# Altium PCB Driver_1.PcbDoc
Units mil, origin at the board's own origin, x right, y up, seen from the top; angles counter-clockwise.
Board outline 3937.01 x 3937.01 mil, 2 copper layers (Top Layer, Bottom Layer); 114 components, 78 nets, 357 pads, 413 vias.
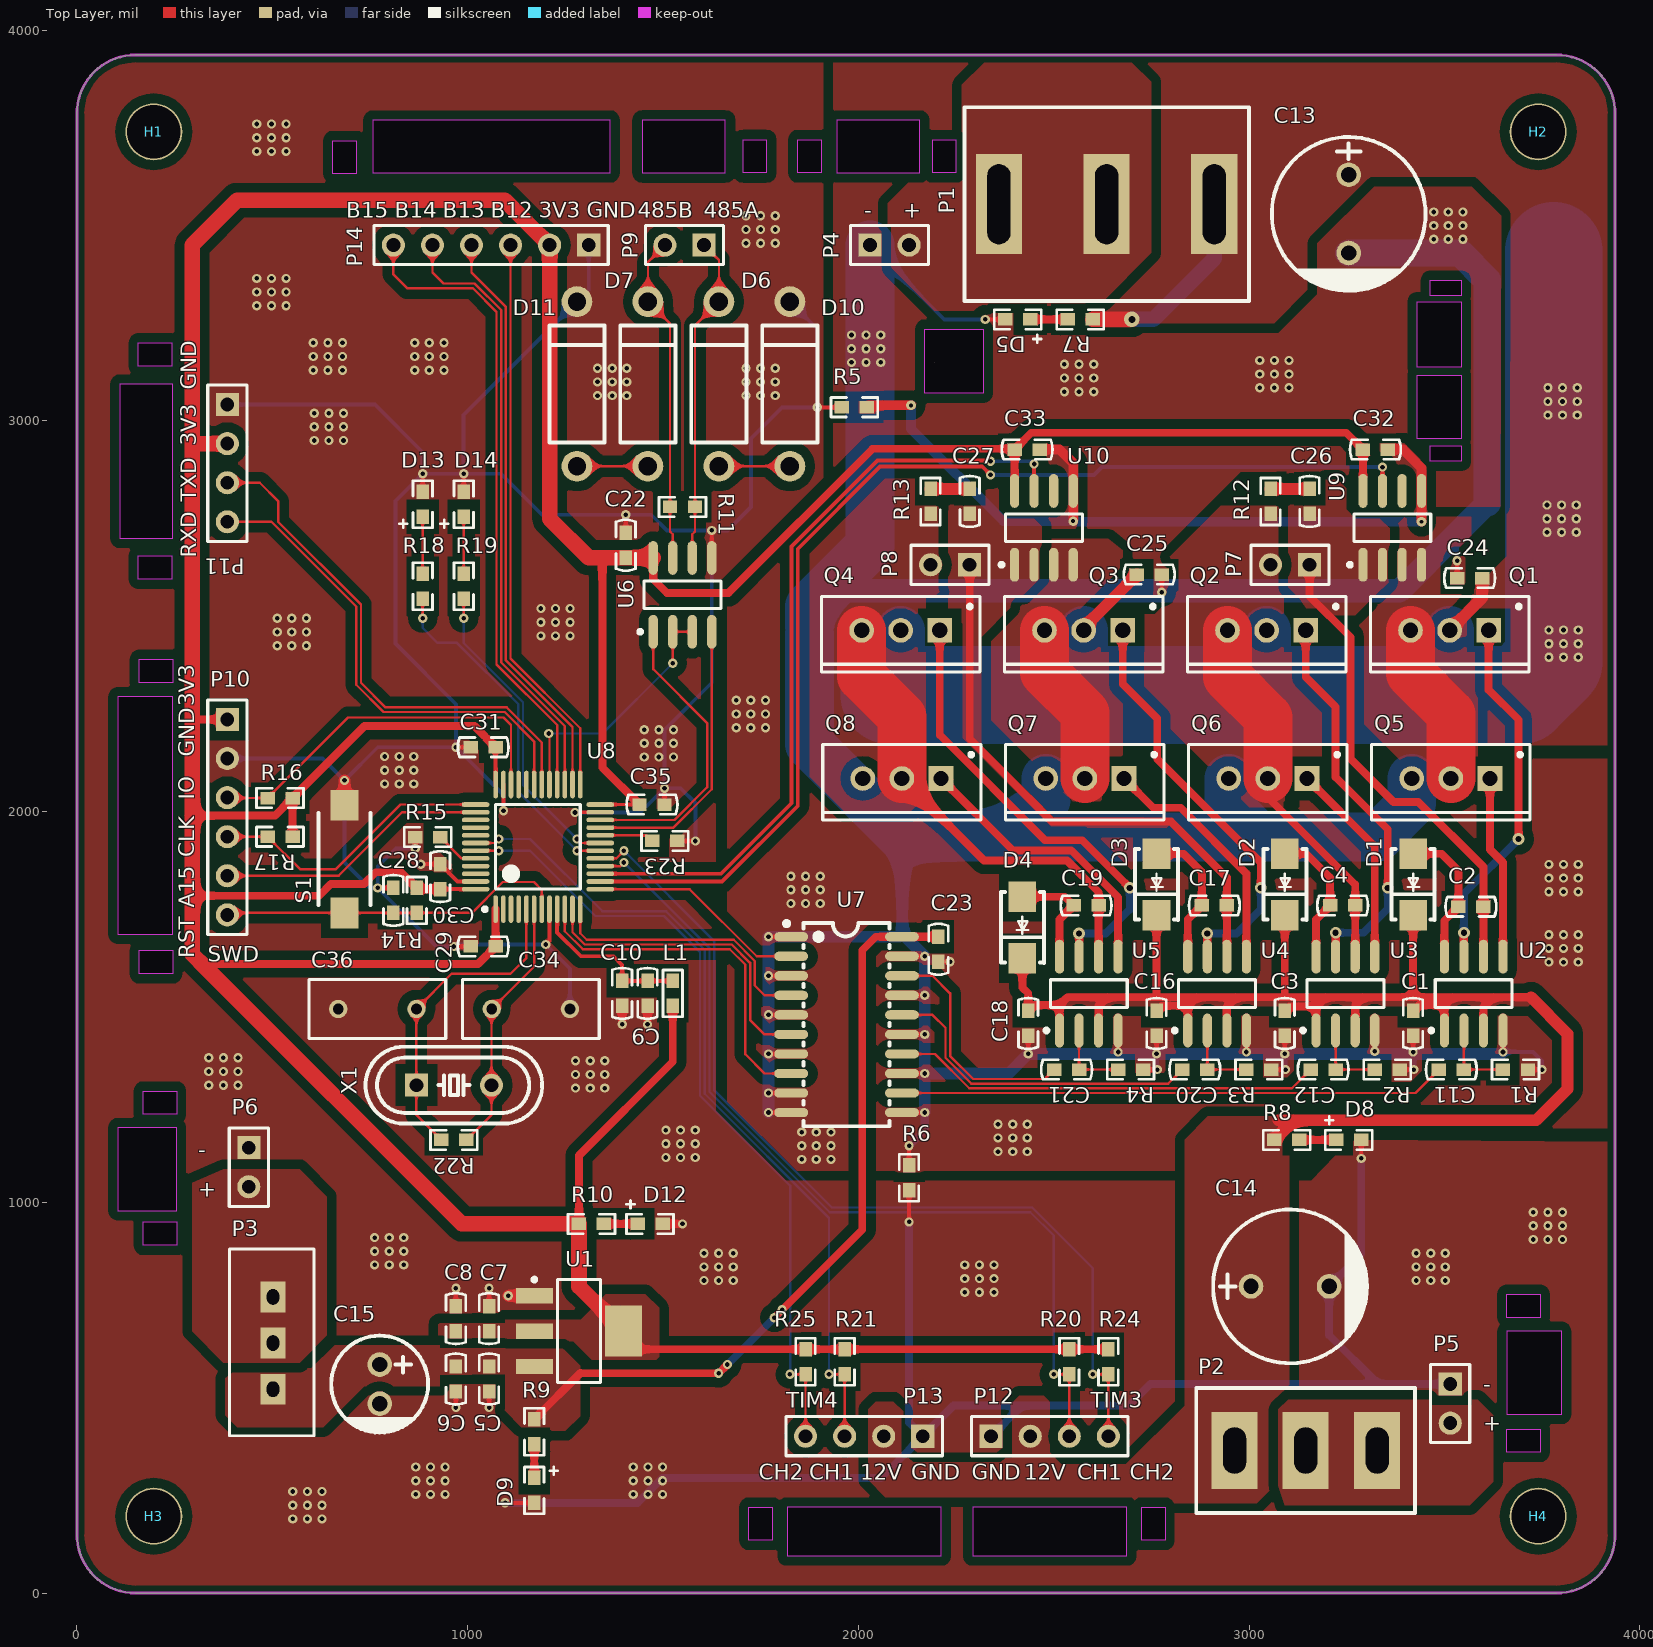
[diagram p0: Top Layer view]
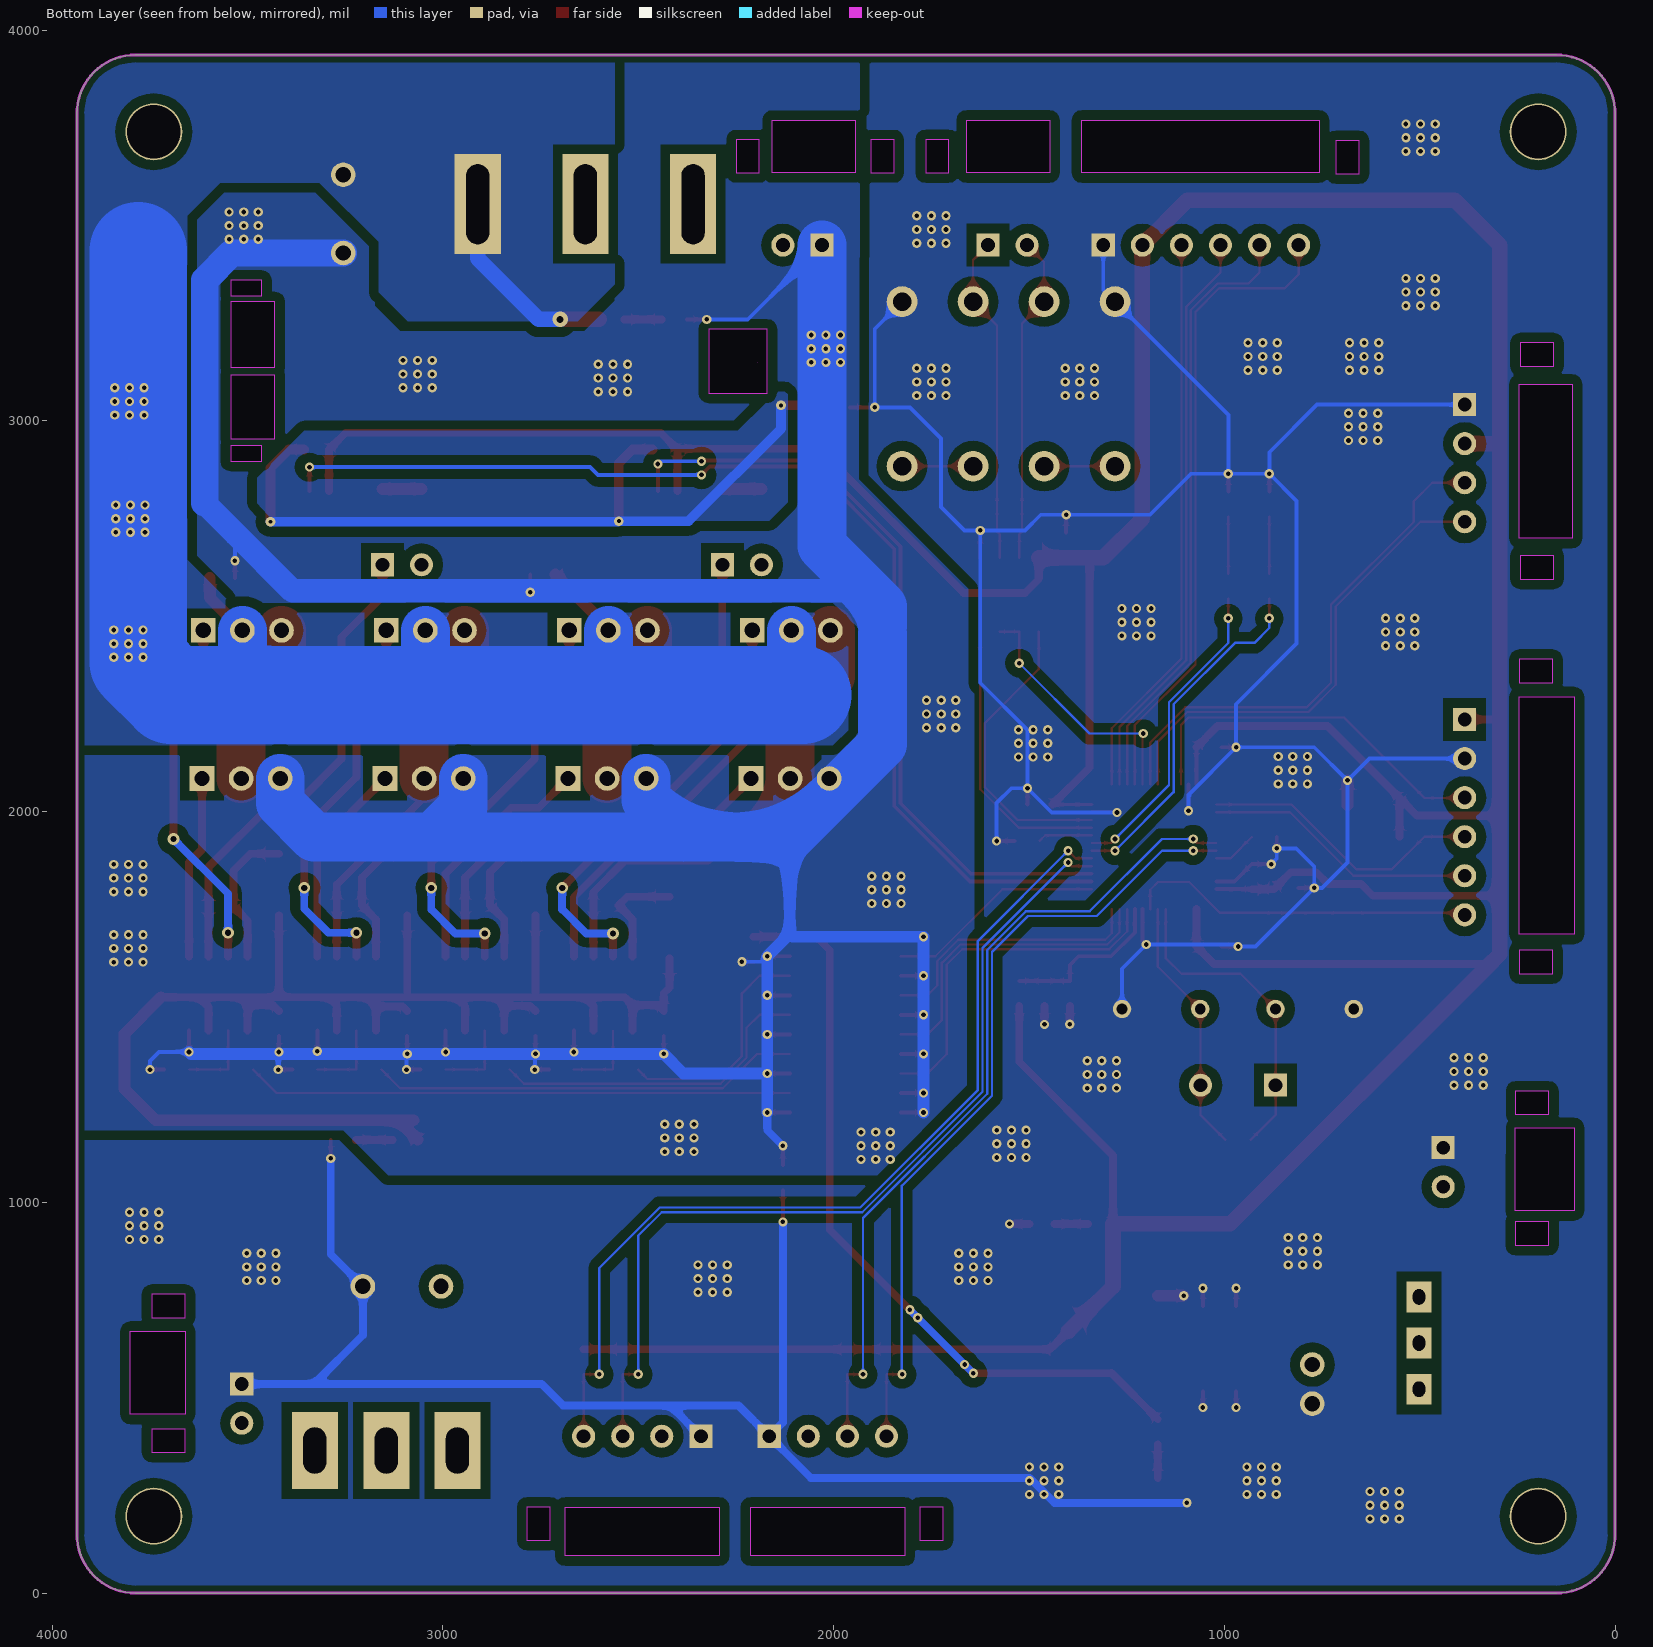
[diagram p1: Bottom Layer view, seen from below]

## Layer stack, top to bottom
Top Solder: solder mask 0.4, Solder Resist, Dk 3.5
Top Layer: signal copper 1.4
Dielectric 1: dielectric 12.6, FR-4, Dk 4.8
Bottom Layer: signal copper 1.4
Bottom Solder: solder mask 0.4, Solder Resist, Dk 3.5

## Board outline
150,0 cw(c150,150) 0,150 0,3787.01 cw(c150,3787.01) 150,3937.01 3787.01,3937.01 cw(c3787.01,3787.01) 3937.01,3787.01 3937.01,150 cw(c3787.01,150) 3787.01,0
cut-out: 3543.75,3320 3463.75,3320 3463.75,3360 3543.75,3360
cut-out: 157.5,3200 242.5,3200 242.5,3140 157.5,3140
cut-out: 655,3632.5 655,3717.5 715,3717.5 715,3632.5
cut-out: 3543.75,2897 3463.75,2897 3463.75,2937 3543.75,2937
cut-out: 3430,3117.5 3543.75,3117.5 3543.75,2955 3430,2955
cut-out: 3745,705 3660,705 3660,765 3745,765
cut-out: 3745,360 3660,360 3660,420 3745,420
cut-out: 2725,135 2725,220 2785,220 2785,135
cut-out: 1720,135 1720,220 1780,220 1780,135
cut-out: 170,950 255,950 255,890 170,890
cut-out: 170,1285 255,1285 255,1225 170,1225
cut-out: 160,2390 245,2390 245,2330 160,2330
cut-out: 160,1645 245,1645 245,1585 160,1585
cut-out: 2250,3720 2250,3635 2190,3635 2190,3720
cut-out: 1905,3720 1905,3635 1845,3635 1845,3720
cut-out: 1765,3720 1765,3635 1705,3635 1705,3720
cut-out: 157.5,2655 242.5,2655 242.5,2595 157.5,2595
cut-out: 3430,3305 3543.75,3305 3543.75,3137.5 3430,3137.5
cut-out: 2170,3235 2320,3235 2320,3071.25 2170,3071.25
cut-out: 2195,3150
cut-out: 245,1686.25 245,2293.75 105,2293.75 105,1686.25
cut-out: 255,978.75 255,1191.25 105,1191.25 105,978.75
cut-out: 3800,457.5 3800,670 3660,670 3660,457.5
cut-out: 1945,3635 2157.5,3635 2157.5,3770 1945,3770
cut-out: 245,2699.5 245,3094.5 110,3094.5 110,2699.5
cut-out: 2292.5,95 2687.5,95 2687.5,220 2292.5,220
cut-out: 1817.5,95 2212.5,95 2212.5,220 1817.5,220
cut-out: 1447.5,3635 1660,3635 1660,3770 1447.5,3770
cut-out: 757.5,3635 1365,3635 1365,3770 757.5,3770

## Design rules (kind name [scope] priority, off if disabled: settings)
Clearance Clearance_2 [InPolygon vs OnLayer('Keep-Out Layer')] p1: gap=15.75 ignorepadtopadclearanceinfootprint=FALSE
Clearance Clearance_1 [All vs InPolygon] p2: gap=25 ignorepadtopadclearanceinfootprint=FALSE
Clearance [All] p3: gap=5 ignorepadtopadclearanceinfootprint=FALSE
HoleSize [All] p1: absolutevalues=TRUE maxlimit=300 minlimit=1 maxpercent=80.000 minpercent=20.000
PlaneConnect [All] p1: planeconnectstyle=Direct reliefexpansion=20 reliefentries=4 reliefconductorwidth=10 reliefairgap=10
PolygonConnect [All] p1: connectstyle=Direct reliefconductorwidth=10 reliefentries=4 polygonreliefangle="90 Angle" airgapwidth=10
RoutingVias [All] p1: holewidth=28 width=50 viastyle="Through Hole" minholewidth=28 minwidth=50 maxholewidth=28 maxwidth=50
ShortCircuit [All] p1: allowed=TRUE
SilkToSilkClearance [All] p1: silktosilkclearance=2
SilkToSolderMaskClearance [IsPad] p1: minsilkscreentomaskgap=2 clearancetoexposedcopper=TRUE
SolderMaskExpansion [All] p1: expansion=4
Width [All] p1: maxlimit=250 minlimit=6 preferedwidth=6 minimp=50.000000 maximp=50.000000 favimp=50.000000
25 further rules are at their usual default settings.

## Components (designator, comment, footprint, x,y, rotation, side; value= is the part's Value field where it differs from the comment)
C1 "0.1μF" 0603C 3420,1458 r90 top
C2 "1μF" 0603C 3568,1756.73 r0 top
C3 "0.1μF" 0603C 3091.67,1458 r90 top
C4 "1μF" 0603C 3239.67,1760 r0 top
C5 "10μF" 0603C 1055,548 r90 top
C6 "0.1μF" 0603C 970,548 r90 top
C7 "10μF" 0603C 1055,702.55 r270 top
C8 "0.1μF" 0603C 970,702.55 r270 top
C9 "0.1μF" 0603C 1460.55,1535 r90 top
C10 "1μF" 0603C 1395.55,1535 r90 top
C11 "0.1μF" 0603C 3518,1340 r0 top
C12 "0.1μF" 0603C 3189.67,1340 r0 top
C13 "220μF 50V" CAP-TH_BD10.0-P5.00-D1.0-FD 3255,3530 r270 top
C14 "220μF 50V" CAP-TH_BD10.0-P5.00-D1.0-FD 3105,785 r0 top
C15 "220μF 16V" CAP-TH_BD6.3-P2.50-D1.0-FD 775,535 r270 top
C16 "0.1μF" 0603C 2763.33,1458 r90 top
C17 "1μF" 0603C 2911.33,1760 r0 top
C18 "0.1μF" 0603C 2435,1458 r90 top
C19 "1μF" 0603C 2583,1760 r0 top
C20 "0.1μF" 0603C 2861.33,1340 r0 top
C21 "0.1μF" 0603C 2533,1340 r0 top
C22 "0.1μF" 0603C 1405,2682 r90 top
C23 "100nF" 0603C 2205,1648 r270 top
C24 "1μF" 0603C 3564.67,2598 r0 top
C25 "1μF" 0603C 2744.67,2607 r180 top
C26 "0.1μF" 0603C 3155,2794 r270 top
C27 "0.1μF" 0603C 2285,2794 r270 top
C28 "0.1μF" 0603C 810,1773 r270 top
C29 "0.1μF" 0603C 1039.73,1655 r0 top
C30 "0.1μF" 0603C 930,1833.73 r270 top
C31 "0.1μF" 0603C 1039.73,2165 r0 top
C32 "0.1μF" 0603C 3323.67,2927 r180 top
C33 "0.1μF" 0603C 2432,2927 r180 top
C34 "20nF" RAD-0.2 1161.93,1495 r0 top
C35 "0.1μF" 0603C 1472,2018.27 r180 top
C36 "20nF" RAD-0.2 769,1495 r180 top
D1 "D-SS12" SMA_L4.4-W2.6-LS5.0-RD 3420,1813.74 r90 top
D2 "D-SS12" SMA_L4.4-W2.6-LS5.0-RD 3091.67,1813.74 r90 top
D3 "D-SS12" SMA_L4.4-W2.6-LS5.0-RD 2763.33,1813.74 r90 top
D4 "D-SS12" SMA_L4.4-W2.6-LS5.0-RD 2420,1703.74 r90 top
D5 "LED_0603" 0603D 2408,3260 r180 top
D6 "P6KE11A" DO-15_BD3.1-L6.7-P10.70-D0.9-FD 1643.33,3095 r90 top
D7 "P6KE11A" DO-15_BD3.1-L6.7-P10.70-D0.9-FD 1461.67,3095 r90 top
D8 "LED_0603" 0603D 3255.33,1160 r0 top
D9 "LED_0603" 0603D 1170.83,263 r270 top
D10 "P6KE6.8A" DO-15_BD3.1-L6.7-P10.70-D0.9-FD 1825,3095 r90 top
D11 "P6KE6.8A" DO-15_BD3.1-L6.7-P10.70-D0.9-FD 1280,3095 r90 top
D12 "LED_0603" 0603D 1467,945 r0 top
D13 "LED_0603" 0603D 885,2787 r90 top
D14 "LED_0603" 0603D 990,2787 r90 top
H1 "安装孔" 安装孔 196.85,3740.16 r0 top
H2 "安装孔" 安装孔 3740.16,3740.16 r0 top
H3 "安装孔" 安装孔 196.85,196.85 r0 top
H4 "安装孔" 安装孔 3740.16,196.85 r0 top
L1 "Inductor" 0603L 1525,1535 r90 top
P1 "SWITCH36" 船型开关 2719.76,3643.03 r270 top
P2 "SWITCH12" 钮子开关 3145,365 r90 top
P3 "SWITCH5" SWITCH_SS-12F44 502,758.11 r270 top
P4 "PWR36" HDR1X2 2030,3450 r0 top
P5 "PWR12" HDR1X2 3515,535 r270 top
P6 "PWR5" HDR1X2 440,1140 r270 top
P7 "MOTOR" HDR1X2 3155,2632 r180 top
P8 "MOTOR" HDR1X2 2285,2632 r180 top
P9 "RS485" HDR1X2 1605,3450 r180 top
P10 "Header 6" HDR1X6 385,2236 r270 top
P11 "UART" HDR1X4 385,3042 r270 top
P12 "CODER" HDR1X4 2340,401.51 r0 top
P13 "CODER" HDR1X4 2165,401.51 r180 top
P14 "GPIO" HDR1X6 1310,3450 r180 top
Q1 "IRF3205" TO-262-AA 3513.33,2464 r180 top
Q2 "IRF3205" TO-262-AA 3045,2464 r180 top
Q3 "IRF3205" TO-262-AA 2576.67,2464 r180 top
Q4 "IRF3205" TO-262-AA 2108.33,2464 r180 top
Q5 "IRF3205" TO-262-AA 3516.67,2085 r180 top
Q6 "IRF3205" TO-262-AA 3048.33,2085 r180 top
Q7 "IRF3205" TO-262-AA 2580,2085 r180 top
Q8 "IRF3205" TO-262-AA 2111.67,2085 r180 top
R1 "10K" 0603R 3682,1340 r180 top
R2 "10K" 0603R 3353.67,1340 r180 top
R3 "10K" 0603R 3025.33,1340 r180 top
R4 "10K" 0603R 2697,1340 r180 top
R5 "0Ω" 0603R 1990,3035 r180 top value=10K
R6 "0Ω" 0603R 2130,1063 r270 top value=10K
R7 "10K" 0603R 2568,3260 r0 top
R8 "10K" 0603R 3096.5,1160.01 r180 top
R9 "10K" 0603R 1170.83,413 r90 top
R10 "10K" 0603R 1317,945 r180 top
R11 "120" 0603R 1550,2780 r180 top value=10K
R12 "100R" 0603R 3055,2794 r270 top value=10K
R13 "100R" 0603R 2185,2794 r270 top value=10K
R14 "10K" 0603R 870,1773 r270 top
R15 "10K" 0603R 898,1935 r0 top
R16 "10K" 0603R 520,2035 r180 top
R17 "10K" 0603R 520,1936 r180 top
R18 "10K" 0603R 885,2577 r270 top
R19 "10K" 0603R 990,2577 r270 top
R20 "10K" 0603R 2540,592 r90 top
R21 "10K" 0603R 1965,592 r90 top
R22 "1M" 0603R 965,1160 r180 top value=10K
R23 "10K" 0603R 1505,1925 r0 top
R24 "10K" 0603R 2640,592 r90 top
R25 "10K" 0603R 1865,592 r90 top
S1 "SW_PB" SMD_6MM*3MM 685,1878.8 r90 top
U1 "AS1117-3.3" SOT223_N 1285,670.55 r0 top
U2 "IR2104S" SO8_N 3575,1534.49 r90 top
U3 "IR2104S" SO8_N 3246.67,1534.49 r90 top
U4 "IR2104S" SO8_N 2918.33,1534.49 r90 top
U5 "IR2104S" SO8_N 2590,1534.49 r90 top
U6 "MAX3485" SO8_N 1550,2555 r90 top
U7 "74HC244" SOIC-20_L13.3-W5.5-P1.27-LS7.8-BL 1970,1455 r270 top
U8 "stm32f103c8t6" STM-LQFP48_N 1180,1910 r90 top
U9 "CC6904SO" SO8_N 3366.67,2726.49 r90 top
U10 "CC6904SO" SO8_N 2475,2726.49 r90 top
X1 "8MHz" HC-49US_L11.5-W4.5-P4.88 965,1300 r0 top

## Footprints (in the part's own frame and the unit in brackets; to place one, negate y for a bottom-side part, rotate by r counter-clockwise, add the part's x,y. Pads: shape width x height; smd on the part's side, far side on the other; paste and mask are expansions set on the pad)
0603C [mil]
  rect 37x32 smd: 1(-32,0) 2(32,0)
  silkscreen extent -65,-25 65,25, body extent -31,-16 32,16, height 12
0603D [mil]
  rect 37x32 smd: 1(-32,0) 2(32,0)
  silkscreen extent -60,-25 60,60, body extent -31,-16 32,16, height 12
0603L [mil]
  rect 37x32 smd: 1(-32,0) 2(32,0)
  silkscreen extent -60,-25 60,25, body extent -31,-16 32,16, height 12
0603R [mil]
  rect 37x32 smd: 1(-32,0) 2(32,0)
  silkscreen extent -60,-25 60,25, body extent -31,-16 32,16, height 12
CAP-TH_BD6.3-P2.50-D1.0-FD [mm]
  round 1.6 hole 1: 1(-1.27,0) 2(1.27,0)
  silkscreen extent -3.15,-3.15 3.17,3.15
CAP-TH_BD10.0-P5.00-D1.0-FD [mm]
  round 1.6 hole 1: 1(-2.54,0) 2(2.54,0)
  silkscreen extent -5,-4.99 5.08,5
DO-15_BD3.1-L6.7-P10.70-D0.9-FD [mm]
  round 2 hole 1.2: 1(-5.35,0) 2(5.35,0)
  silkscreen extent -3.8,-1.8 3.8,1.8
HC-49US_L11.5-W4.5-P4.88 [mm]
  rect 1.5x1.5 hole 0.9: 1(-2.438,0)
  round 1.5 hole 0.9: 2(2.438,0)
  silkscreen extent -5.74,-2.5 5.74,2.5
HDR1X2 [mm] "Connector; Header; 2 Position"
  rect 1.5x1.5 hole 0.9: 1(0,0)
  round 1.5 hole 0.9: 2(2.54,0)
  silkscreen extent -1.27,-1.27 3.81,1.27
HDR1X4 [mm] "Connector; Header; 4 Position"
  rect 1.5x1.5 hole 0.9: 1(0,0)
  round 1.5 hole 0.9: 2(2.54,0) 3(5.08,0) 4(7.62,0)
  silkscreen extent -1.27,-1.27 8.89,1.27
HDR1X6 [mm] "Connector; Header; 6 Position"
  rect 1.5x1.5 hole 0.9: 1(0,0)
  round 1.5 hole 0.9: 2(2.54,0) 3(5.08,0) 4(7.62,0) 5(10.16,0) 6(12.7,0)
  silkscreen extent -1.27,-1.27 13.97,1.27
RAD-0.2 [mm] "Radial Cap, Thru-Hole; 2 Leads; 0.2 in Pin Spacing"
  round 1.2 hole 0.7: 1(-2.54,0) 2(2.54,0)
  silkscreen extent -4.44,-1.91 4.44,1.91
SMA_L4.4-W2.6-LS5.0-RD [mm]
  rect 2x1.8 smd: 1(-2,0) 2(2,0)
  silkscreen extent -2.3,-1.4 2.3,1.4
SMD_6MM*3MM [mm]
  rect 2x1.8 smd: 1(-3.5,0) 2(3.5,0)
  silkscreen extent -3,-1.7 3,1.7
SO8_N [mm] "SOIC, 8-Leads, Body 4.9x3.9mm, Pitch 1.27mm, IPC Medium Density"
  oval 2.2x0.6 smd: 1(-2.4,1.905) 2(-2.4,0.635) 3(-2.4,-0.635) 4(-2.4,-1.905) 5(2.4,-1.905) 6(2.4,-0.635) 7(2.4,0.635) 8(2.4,1.905)
  silkscreen extent -2.52,-2.5 0.9,2.88, body extent -2,-2.5 2,2.5, height 1.75
SOIC-20_L13.3-W5.5-P1.27-LS7.8-BL [mm]
  oval 0.6x2.198 smd: 1(-5.715,-3.6) 2(-4.445,-3.6) 3(-3.175,-3.6) 4(-1.905,-3.6) 5(-0.635,-3.6) 6(0.635,-3.6) 7(1.905,-3.6) 8(3.175,-3.6) 9(4.445,-3.6) 10(5.715,-3.6) 11(5.715,3.6) 12(4.445,3.6) 13(3.175,3.6) 14(1.905,3.6) 15(0.635,3.6) 16(-0.635,3.6) 17(-1.905,3.6) 18(-3.175,3.6) 19(-4.445,3.6) 20(-5.715,3.6)
  silkscreen extent -6.72,-4.05 6.6,2.79
SOT223_N [mm] "SOT223, 4-Leads, Body 6.5x3.5mm, Pitch 2.3mm, Lead Span 7mm, IPC Medium Density"
  rect 2.4x1 smd: 1(-2.9,2.3) 2(-2.9,0) 3(-2.9,-2.3)
  rect 2.4x3.3 smd: 4(2.9,0)
  silkscreen extent -3.02,-3.35 1.4,3.47, body extent -1.85,-3.35 1.85,3.35, height 1.7
STM-LQFP48_N [mm] "QFP, 48-Leads, Body 7x7mm, Pitch 0.5mm, IPC Medium Density"
  oval 1.8x0.3 smd: 1(-4.05,2.75) 2(-4.05,2.25) 3(-4.05,1.75) 4(-4.05,1.25) 5(-4.05,0.75) 6(-4.05,0.25) 7(-4.05,-0.25) 8(-4.05,-0.75) 9(-4.05,-1.25) 10(-4.05,-1.75) 11(-4.05,-2.25) 12(-4.05,-2.75) 25(4.05,-2.75) 26(4.05,-2.25) 27(4.05,-1.75) 28(4.05,-1.25) 29(4.05,-0.75) 30(4.05,-0.25) 31(4.05,0.25) 32(4.05,0.75) 33(4.05,1.25) 34(4.05,1.75) 35(4.05,2.25) 36(4.05,2.75)
  oval 0.3x1.8 smd: 13(-2.75,-4.05) 14(-2.25,-4.05) 15(-1.75,-4.05) 16(-1.25,-4.05) 17(-0.75,-4.05) 18(-0.25,-4.05) 19(0.25,-4.05) 20(0.75,-4.05) 21(1.25,-4.05) 22(1.75,-4.05) 23(2.25,-4.05) 24(2.75,-4.05) 37(2.75,4.05) 38(2.25,4.05) 39(1.75,4.05) 40(1.25,4.05) 41(0.75,4.05) 42(0.25,4.05) 43(-0.25,4.05) 44(-0.75,4.05) 45(-1.25,4.05) 46(-1.75,4.05) 47(-2.25,4.05) 48(-2.75,4.05)
  silkscreen extent -4.17,-2.75 2.75,3.57, body extent -3.5,-3.5 3.5,3.5, height 1.6
SWITCH_SS-12F44 [mm]
  rect 2x1.6 hole 0.8 slot 1 at 0 deg: 1(0,0) 2(3,0) 3(6,0)
  silkscreen extent -3.12,-2.83 9.02,2.67
TO-262-AA [mm] "TO, Thru-Hole, Vertical, Heatsink Mounted; 3 In-Line Leads; Pitch 2.54 mm"
  rect 1.6x1.6 hole 1: 1(-2.54,0)
  round 1.6 hole 1: 2(0,0) 3(2.54,0)
  silkscreen extent -5.15,-2.2 5.15,2.7, body extent -5.2,-2.25 5.2,2.75, height 19.7
安装孔 [mm]
  round 3.7 hole 3.5: 1(0,0)
船型开关 [mm]
  rect 6.5x3 hole 1.5 slot 5.2 at 0 deg: 1(2.236,-9.138) 2(2.236,-2.138) 3(2.236,4.862)
  silkscreen extent -4.06,-11.39 8.54,7.11
钮子开关 [mm]
  rect 5x3 hole 1.5 slot 3 at 0 deg: 1(0,-4.648) 2(0,0) 3(0,4.623)
  silkscreen extent -4.06,-7.11 4.06,7.11

## Part data
C1 C2 C3 C4 C5 C6 C7 C8 C9 C10 C11 C12 C16 C17 C18 C19 C20 C21 C22 C23 C24 C25 C26 C27 C28 C29 C30 C31 C32 C33 C34 C35 C36: library part Cap, "Capacitor", LatestRevisionDate=17-Jul-2002, LatestRevisionNote="Re-released for DXP Platform.", PackageDescription="Radial Cap, Thru-Hole; 2 Leads; 0.3 in Pin Spacing", PackageReference=RAD-0.3, Published=8-Jun-2000, Publisher="Altium Limited"
C13 C14 C15: library part Cap_A, "Capacitor"
D6 D7 D10 D11: library part P6KE68A, BOM_Manufacturer=RUILON, BOM_Manufacturer Part=P6KE68A, BOM_Supplier=LCSC, BOM_Supplier Part=C10195, spicePre=D, spiceSymbolName=P6KE68A
P1 P2 P3: library part "Header 3", "Header, 3-Pin", LatestRevisionDate=17-Jul-2002, LatestRevisionNote="Re-released for DXP Platform.", Publisher="Altium Limited"
P4 P5 P6 P7 P8 P9: library part "Header 2", "Header, 2-Pin", LatestRevisionDate=17-Jul-2002, LatestRevisionNote="Re-released for DXP Platform.", Publisher="Altium Limited"
P10: "Header, 6-Pin", LatestRevisionDate=17-Jul-2002, LatestRevisionNote="Re-released for DXP Platform.", Publisher="Altium Limited"
P11 P12 P13: library part "Header 4", "Header, 4-Pin", LatestRevisionDate=17-Jul-2002, LatestRevisionNote="Re-released for DXP Platform.", Publisher="Altium Limited"
P14: library part "Header 6", "Header, 6-Pin", LatestRevisionDate=17-Jul-2002, LatestRevisionNote="Re-released for DXP Platform.", Publisher="Altium Limited"
R1 R2 R3 R4 R5 R6 R7 R8 R9 R10 R11 R12 R13 R14 R15 R16 R17 R18 R19 R20 R21 R22 R23 R24 R25: library part Res1, "Resistor", LatestRevisionDate=17-Jul-2002, LatestRevisionNote="Re-released for DXP Platform.", PackageDescription="Axial Device, Thru-Hole; 2 Leads; 0.3 in Pin Spacing", PackageReference=AXIAL-0.3, Published=8-Jun-2000, Publisher="Altium Limited"
S1: "SWITCH"
U9 U10: library part CC6902SO
X1: "Crystal", BOM_Manufacturer="ZheJiang East Crystal Elec", BOM_Manufacturer Part=B08000J065, BOM_Supplier=LCSC, BOM_Supplier Part=C258976, Contributor=LCSC, nameAlias=Frequency, spicePre=X, spiceSymbolName=B08000J065
Q1 Q2 Q3 Q4 Q5 Q6 Q7 Q8: Code_JEDEC=TO-220-AB, DatasheetDocument=PD-9.814, LatestRevisionDate=17-Jul-2002, LatestRevisionNote="Re-released for DXP Platform.", Note="Pin 2 is electrically connected to pin 4.", PackageReference=TO-220AB, Published=8-Jun-2000, Publisher="Altium Limited"

## Via types
v1: diameter 23.62, hole 11.81, Top Layer to Bottom Layer, tented both sides, 401 vias
v2: diameter 30, hole 16, Top Layer to Bottom Layer, tented both sides, 8 vias
v3: diameter 25, hole 10, Top Layer to Bottom Layer, tented both sides, 3 vias
v4: diameter 40, hole 18, Top Layer to Bottom Layer, tented both sides, 1 vias

## Nets (pads, with @x,y where several pads share a name; then routed paths per layer and width w, separated by ;. In a path a pad name is that pad's centre, name@x,y a point inside that pad or via, vN(x,y) a via of type N, cw(c..) or ccw(c..) an arc to the next point about the centre after c; other vN are vias at no path point)
485DIR: U6.2 U6.3 U8.29 | length 653.5
  Top Layer w6: v1(1207.82,2200) 1209.53,2198.29 U8.29 ; v1(1525,2380) U6.2 U6.3
  Bottom Layer w6: v1(1207.82,2200) 1345,2200 v1(1525,2380)
ADC12_IN4: U8.14 U9.7 | length 2905
  Top Layer w10: U8.14 1651.42,1821.42 1845,2015 1845,2672.37 2055.63,2883 2317.33,2883 v1(2338.33,2862) ; U9.7 v1(3341.67,2882)
  Bottom Layer w10: v1(2338.33,2862) 2603.33,2862 2623.33,2882 v1(3341.67,2882)
ADC12_IN5: U8.15 U10.7 | length 2006.6
  Top Layer w10: U8.15 1648.47,1841.1 1829,2021.63 1829,2679 2049,2899 2336.33,2899 v1(2338.33,2897) ; U10.7 v1(2450,2890)
  Bottom Layer w10: v1(2338.33,2897) 2443,2897 v1(2450,2890)
AGND: C32.1 C33.1 R5.1 U9.5 U10.5 | length 2072.6
  Top Layer w25: R5.1 2027,3040 v3(2135,3040) ; C33.1 2515,2927 2550,2892 U10.5 v3(2550,2743.67) ; C32.1 3394.67,2927 3441.67,2880 U9.5 v3(3441.67,2742)
  Bottom Layer w25: v3(2135,3040) 2135,2980 2371.33,2743.67 v3(2550,2743.67) 2551.67,2742 v3(3441.67,2742)
DGND: C5.1 C6.1 C7.1 C8.1 C9.1 C10.1 C14.2 C15.2 C22.2 C28.1 C29.1 C30.1 C31.1 C34.2 C35.1 C36.2 D8.2 D9.2 D10.2 D11.2 D12.2 D13.2 D14.2 P5.1 P6.1 P10.2 P11.1 P12.1 P13.1 P14.1 R5.2 R6.2 R15.1 R23.2 S1.2 U1.1 U6.5 U8.8 U8.23 U8.35 U8.47 | length 12386.3
  Top Layer w10: v1(770,1805) C28.1 ; v1(866,1906) R15.1 ; v1(880,1865.73) C30.1 974.32,1821.42 U8.47 ; D13.2 v1(885,2865) ; v1(965,1655) C29.1 ; v1(970,475) C6.1 ; C8.1 v1(970,780) ; v1(970,2165) C31.1 ; D14.2 v1(990,2865) ; v1(1055,475) C5.1 ; C7.1 v1(1055,780) ; U8.35 1091.42,2003.29 v1(1092.03,2002.68) ; v1(1096,231) D9.2 ; v1(1200,1660) 1209.53,1669.53 U8.8 ; v1(1274.87,1997.95) 1275.51,1998.58 U8.23 ; C22.2 v1(1405,2760) ; v1(1504,2060) C35.1 C35.1@1505,2019.27 ; R23.2 v1(1583,1925) ; U6.5 v1(1625,2720) ; v1(1895,3035) R5.2 ; v1(2130,950) R6.2 ; v1(3287.33,1112.67) D8.2
  Top Layer w20: v1(1395.55,1456.1) C10.1 ; v1(1460.55,1455.55) C9.1 ; D12.2 v1(1550,945)
  Top Layer w30: S1.2 v1(685,2080) ; v1(1103.9,761.1) U1.1
  Bottom Layer w10: P10.2 629,2136 v1(685,2080) ; P11.1 763,3042 885,2920 v1(885,2865) ; v1(880,1865.73) 866,1879.73 v1(866,1906) 816,1906 770,1860 v1(770,1805) ; v1(1092.03,2002.68) 1092.03,2038.52 1089.8,2040.75 1092.03,2042.97 v1(970,2165) ; C34.2 1261.93,1598.07 v1(1200,1660) 970,1660 v1(965,1655) 920,1655 v1(770,1805) ; v1(1274.87,1997.95) 1441.95,1997.95 v1(1504,2060) ; P14.1 1310,3335.63 D11.2 990,3015.63 v1(990,2865) ; v1(1583,1925) 1583,2022 1545,2060 v1(1504,2060) ; D10.2 1895,3235.63 v1(1895,3035) 1805,3035 1725,2955 1725,2780 1665,2720 v1(1625,2720) ; v1(685,2080) 770,2165 v1(970,2165) ; v1(685,2080) 685,1870 750,1805 v1(770,1805) ; v1(885,2865) v1(990,2865) ; v1(885,2865) 815,2795 815,2430 970,2275 v1(970,2165) ; v1(990,2865) 1085,2865 1190,2760 v1(1405,2760) 1470,2760 1510,2720 v1(1625,2720) ; v1(1504,2060) 1504,2209 1625,2330 v1(1625,2720)
  Bottom Layer w20: v1(1096,231) 1435,231 1499,295 2058.49,295 P13.1 ; v1(2130,950) 2130,436.51 P13.1 ; P12.1 2418.49,480 ; v1(3287.33,1112.67) 3287.33,867.33 C14.2 3205,660 3330,535 ; P5.1 3330,535 ; P13.1 2243.49,480 2418.49,480 ; 2418.49,480 2692.5,480 2747.5,535 3330,535
  other v1: 552.56,190 590,190 627.44,190 552.56,225 590,225 627.44,225 867.56,252.67 905,252.67 942.44,252.67 1424.23,252.67 1461.67,252.67 1499.11,252.67 552.56,260 590,260 627.44,260 867.56,287.67 905,287.67 942.44,287.67 1424.23,287.67 1461.67,287.67 1499.11,287.67 867.56,322.67 905,322.67 942.44,322.67 1424.23,322.67 1461.67,322.67 1499.11,322.67 2272.56,770 2310,770 2347.44,770 1605.06,800 1642.5,800 1679.94,800 3427.56,800 3465,800 3502.44,800 2272.56,805 2310,805 2347.44,805 1605.06,835 1642.5,835 1679.94,835 3427.56,835 3465,835 3502.44,835 761.97,840 799.41,840 836.84,840 2272.56,840 2310,840 2347.44,840 1605.06,870 1642.5,870 1679.94,870 3427.56,870 3465,870 3502.44,870 761.97,875 799.41,875 836.84,875 3727.56,905 3765,905 3802.44,905 761.97,910 799.41,910 836.84,910 3727.56,940 3765,940 3802.44,940 3727.56,975 3765,975 3802.44,975 1507.56,1115 1545,1115 1582.44,1115 1507.56,1150 1545,1150 1582.44,1150 1507.56,1185 1545,1185 1582.44,1185 1276.32,1292.5 1313.76,1292.5 1351.2,1292.5 337.56,1300 375,1300 412.44,1300 1276.32,1327.5 1313.76,1327.5 1351.2,1327.5 337.56,1335 375,1335 412.44,1335 1276.32,1362.5 1313.76,1362.5 1351.2,1362.5 337.56,1370 375,1370 412.44,1370 787.56,2071.19 825,2071.19 862.44,2071.19 787.56,2106.19 825,2106.19 862.44,2106.19 1452.26,2140 1489.7,2140 1527.14,2140 787.56,2141.19 825,2141.19 862.44,2141.19 1452.26,2175 1489.7,2175 1527.14,2175 1452.26,2210 1489.7,2210 1527.14,2210 512.56,2425 550,2425 587.44,2425 1187.56,2450 1225,2450 1262.44,2450 512.56,2460 550,2460 587.44,2460 1187.56,2485 1225,2485 1262.44,2485 512.56,2495 550,2495 587.44,2495 1187.56,2520 1225,2520 1262.44,2520 607.56,2950 645,2950 682.44,2950 607.56,2985 645,2985 682.44,2985 607.56,3020 645,3020 682.44,3020 1332.56,3065 1370,3065 1407.44,3065 1712.56,3065 1750,3065 1787.44,3065 1332.56,3100 1370,3100 1407.44,3100 1712.56,3100 1750,3100 1787.44,3100 605,3130 642.44,3130 679.88,3130 864.71,3130 902.15,3130 939.59,3130 1332.56,3135 1370,3135 1407.44,3135 1712.56,3135 1750,3135 1787.44,3135 605,3165 642.44,3165 679.88,3165 864.71,3165 902.15,3165 939.59,3165 605,3200 642.44,3200 679.88,3200 864.71,3200 902.15,3200 939.59,3200 460.56,3295 498,3295 535.44,3295 460.56,3330 498,3330 535.44,3330 460.56,3365 498,3365 535.44,3365 1712.56,3455 1750,3455 1787.44,3455 1712.56,3490 1750,3490 1787.44,3490 1712.56,3525 1750,3525 1787.44,3525 460.56,3690 498,3690 535.44,3690 460.56,3725 498,3725 535.44,3725 460.56,3760 498,3760 535.44,3760
IN1+: C2.2 C26.2 P7.1 U2.6 U9.1 U9.2 | length 1224.4
  Top Layer w20: P7.1 3155,2551.67 3260,2446.67 3260,2135 3370,2025 3433.33,2025 3600,1858.33 C2.2 U2.6
IN1-: Q1.3 Q5.2 U9.3 U9.4 | length 421.8
  Top Layer w125: Q1.3 3413.33,2353.67 3516.67,2250.33 Q5.2
IN2+: C17.2 C27.2 P8.1 U4.6 U10.1 U10.2 | length 1453.4
  Top Layer w20: P8.1 2285,2186.63 2496.63,1975 2800,1975 2943.33,1831.67 C17.2 U4.6
IN2-: Q3.3 Q7.2 U10.3 U10.4 | length 421.8
  Top Layer w125: Q3.3 2476.67,2356.33 2580,2253 Q7.2
LED1: R18.2 U8.18 | length 897.2
  Top Layer w6: v1(885,2495) R18.2 ; v1(1280,1900.16) U8.18
  Bottom Layer w6: v1(885,2495) 885,2470 923.03,2431.97 973.03,2431.97 1130,2275 1130,2050.16 v1(1280,1900.16)
LED2: R19.2 U8.19 | length 798.8
  Top Layer w6: v1(990,2495) R19.2 ; v1(1280,1930) 1290.16,1919.84 U8.19
  Bottom Layer w6: v1(990,2495) 990,2431.97 1142,2279.97 1142,2068 v1(1280,1930)
MOS_1H: Q1.1 U2.7 | length 924.8
  Top Layer w20: U2.7 v2(3550,1690) ; Q1.1 3613.33,2311.67 3690,2235 v2(3690,1930)
  Bottom Layer w20: v2(3550,1690) 3550,1790 v2(3690,1930)
MOS_1L: Q5.1 U2.5 | length 469.8
  Top Layer w20: Q5.1 3616.67,1903.33 3650,1870 U2.5
MOS_2H: Q2.1 U3.7 | length 1019
  Top Layer w20: Q2.1 3145,2344.67 3221.67,2268 3221.67,2088.33 3355,1955 v2(3355,1805) ; U3.7 v2(3221.67,1690)
  Bottom Layer w20: v2(3221.67,1690) 3293,1690 3355,1752 v2(3355,1805)
MOS_2L: Q6.1 U3.5 | length 527.8
  Top Layer w20: Q6.1 3321.67,1911.67 U3.5
MOS_3H: Q3.1 U4.7 | length 1081.9
  Top Layer w20: Q3.1 2676.67,2326.67 2765,2238.33 2765,2135 3030,1870 v2(3030,1805) ; U4.7 v2(2893.33,1688.33)
  Bottom Layer w20: v2(2893.33,1688.33) 2968.33,1688.33 3030,1750 v2(3030,1805)
MOS_3L: Q7.1 U4.5 | length 626.8
  Top Layer w20: Q7.1 2755,2010 2825,2010 2993.33,1841.67 U4.5
MOS_4H: Q4.1 U5.7 | length 1186.1
  Top Layer w20: Q4.1 2208.33,2196.67 2478,1927 2573,1927 v2(2695,1805) ; U5.7 v2(2565,1688.33)
  Bottom Layer w20: v2(2565,1688.33) 2633.33,1688.33 2695,1750 v2(2695,1805)
MOS_4L: Q8.1 U5.5 | length 731.1
  Top Layer w20: Q8.1 2395.67,1901 2544.73,1901 2665,1780.73 U5.5
MOTOR2: C4.2 P7.2 Q2.3 Q6.2 R12.2 U3.6 | length 970.3
  Top Layer w20: Q6.2 3048.33,2036.67 3271.67,1813.33 C4.2 U3.6
  Top Layer w125: Q2.3 2945,2344.67 3048.33,2241.33 Q6.2
MOTOR4: C19.2 P8.2 Q4.3 Q8.2 R13.2 U5.6 | length 1210.7
  Top Layer w20: Q8.2 2321.67,1875 2533.96,1875 2615,1793.96 C19.2 U5.6
  Top Layer w125: Q4.3 2008.33,2346.33 2111.67,2243 Q8.2
NetC2_1: C2.1 D1.2 U2.8 | length 368.9
  Top Layer w20: D1.2 3492.52,1892.48 3536,1849 C2.1 3500,1720.73 U2.8
NetC4_1: C4.1 D2.2 U3.8 | length 358.6
  Top Layer w20: D2.2 3146.52,1892.48 3207.67,1831.33 C4.1 3171.67,1724 U3.8
NetC11_2: C11.2 R1.2 U2.2 | length 200
  Top Layer w6: U2.2 C11.2 R1.2
NetC12_2: C12.2 R2.2 U3.2 | length 200
  Top Layer w6: U3.2 C12.2 R2.2
NetC17_1: C17.1 D3.2 U4.8 | length 367
  Top Layer w20: D3.2 2832.52,1892.48 2879.33,1845.67 C17.1 2843.33,1724 U4.8
NetC19_1: C19.1 D4.2 U5.8 | length 286.2
  Top Layer w20: D4.2 2528.52,1782.48 C19.1 2515,1724 U5.8
NetC20_2: C20.2 R3.2 U4.2 | length 200
  Top Layer w6: U4.2 C20.2 R3.2
NetC21_2: C21.2 R4.2 U5.2 | length 200
  Top Layer w6: U5.2 C21.2 R4.2
NetC26_1: C26.1 R12.1 | length 100
  Top Layer w30: R12.1 C26.1
NetC27_1: C27.1 R13.1 | length 100
  Top Layer w30: R13.1 C27.1
NetD5_1: D5.1 R7.1 | length 96
  Top Layer w20: D5.1 R7.1
NetD6_1: D6.1 D10.1 | length 181.7
  Top Layer w6: D6.1 D10.1
NetD7_1: D7.1 D11.1 | length 181.7
  Top Layer w6: D11.1 D7.1
NetD8_1: D8.1 R8.1 | length 94.8
  Top Layer w20: R8.1 D8.1
NetD9_1: D9.1 R9.1 | length 86
  Top Layer w20: D9.1 R9.1
NetD12_1: D12.1 R10.1 | length 86
  Top Layer w20: R10.1 D12.1
NetD13_1: D13.1 R18.1 | length 146
  Top Layer w6: R18.1 D13.1
NetD14_1: D14.1 R19.1 | length 146
  Top Layer w6: R19.1 D14.1
NetP1_1: P1.1 P1.2 P4.2
NetP2_1: P2.1 P2.2 P5.2
NetP3_1: P3.1 P3.2 P6.2
NetR15_2: R15.2 U8.44 | length 113.1
  Top Layer w6: R15.2 984.53,1880.47 U8.44
NetR23_1: R23.1 U8.20 | length 139.6
  Top Layer w6: U8.20 1458.47,1939.53 R23.1
NRST: C28.2 P10.6 R14.2 S1.1 U8.7 | length 897.5
  Top Layer w6: P10.6 390,1741 S1.1 C28.2 R14.2 1011,1741 1090,1820 1170,1820 1189.84,1800.16 U8.7
"OSC IN": C36.1 R22.2 U8.5 X1.1 | length 822.1
  Top Layer w6: R22.2 869,1224 X1.1 C36.1 959,1585 1110,1585 1150.47,1625.47 U8.5
"OSC OUT": C34.1 R22.1 U8.6 X1.2 | length 662.3
  Top Layer w6: R22.1 1061,1224 X1.2 1061,1494.07 C34.1 1170.16,1603.23 U8.6
PA15: P10.5 U8.38 | length 702.9
  Top Layer w6: P10.5 669.9,1836 832.48,1998.58 U8.38
PB12: P14.3 U8.25 | length 1454.4
  Top Layer w6: P14.3 1110,2391.97 1288.27,2213.7 U8.25
PB13: P14.4 U8.26 | length 1487.7
  Top Layer w6: P14.4 1010,3380 1098,3292 1098,2387 1268.58,2216.42 U8.26
PB14: P14.5 U8.27 | length 1567.8
  Top Layer w6: P14.5 910,3380 938,3352 1018,3352 1086,3284 1086,2382.03 1248.9,2219.13 U8.27
PB15: P14.6 U8.28 | length 1652.6
  Top Layer w6: P14.6 810,3375 845,3340 1013.03,3340 1074,3279.03 1074,2377.06 1229.21,2221.85 U8.28
PGND: C1.1 C3.1 C13.2 C16.1 C18.1 C23.2 C24.1 C25.1 D5.2 P4.1 Q5.3 Q6.3 Q7.3 Q8.3 R1.1 R2.1 R3.1 R4.1 R6.1 U2.4 U3.4 U4.4 U5.4 U7.1 U7.3 U7.5 U7.7 U7.9 U7.10 U7.11 U7.13 U7.15 U7.17 U7.19 | length 11556
  Top Layer w10: v1(1770,1230) U7.10 ; v1(1770,1280) U7.9 ; v1(1770,1380) U7.7 ; v1(1770,1480) U7.5 ; v1(1770,1580) U7.3 ; v1(1770,1680) U7.1 ; U7.11 v1(2170,1230) ; U7.13 v1(2170,1330) ; U7.15 v1(2170,1430) ; U7.17 v1(2170,1530) ; U7.19 v1(2170,1630) ; R6.1 v1(2130,1145) ; C23.2 v1(2235,1616) ; v1(2325,3260) D5.2 ; v1(2435,1380) C18.1 ; v1(2665,1385) U5.4 ; R4.1 v1(2765,1340) ; v1(2763.33,1380) C16.1 ; v1(2776.67,2561.67) C25.1 ; v1(2993.33,1385) U4.4 ; R3.1 v1(3093.33,1340) ; v1(3091.67,1380) C3.1 ; v1(3321.67,1386.67) U3.4 ; R2.1 v1(3421.67,1340) ; v1(3420,1385) C1.1 ; C24.1 v1(3532.67,2642.33) ; v1(3650,1385) U2.4 ; R1.1 v1(3750,1340)
  Bottom Layer w10: P4.1 2220,3260 v1(2325,3260) ; v1(2170,1630) 2184,1616 v1(2235,1616) ; v1(2763.33,1380) 2765,1378.33 v1(2765,1340) ; v1(3091.67,1380) 3093.33,1378.33 v1(3093.33,1340) ; v1(3420,1385) 3421.67,1383.33 3421.67,1380 v1(3421.67,1340) ; 3530,2710 3532.67,2707.33 v1(3532.67,2642.33) ; v1(3650,1385) 3726.67,1385 3750,1361.67 v1(3750,1340)
  Bottom Layer w20: v1(2130,1145) 2170,1185 v1(2170,1230)
  Bottom Layer w30: v1(1770,1230) v1(1770,1280) v1(1770,1380) v1(1770,1480) v1(1770,1580) v1(1770,1680) 2105.33,1680 2112.67,1687.33 ; 2112.67,1935 2112.67,1687.33 ; v1(2170,1230) v1(2170,1330) ; v1(3650,1385) 3645,1380 3421.67,1380 v1(3091.67,1380) v1(2763.33,1380) v1(2435,1380) 2385,1330 v1(2170,1330) ; 2112.67,1687.33 v1(2170,1630) v1(2170,1530) v1(2170,1430) v1(2170,1330)
  Bottom Layer w60: 1875,2475 1965,2565 3385,2565 3530,2710 3610,2790
  Bottom Layer w70: C13.2 3540.67,3430 3610,3360.67 3610,2790
  Bottom Layer w125: 1875,2455 1875,2172.67 2112.67,1935 2385,1935 ; 1875,2475 1875,2525 2030,2680 P4.1 ; Q7.3 2480,2030 2385,1935 ; Q6.3 2948.33,2013.33 3026.67,1935 ; Q5.3 3416.67,2021.67 3330,1935 3026.67,1935 ; 2385,1935 3026.67,1935
  other v1: 1855.12,1110 1892.56,1110 1930,1110 2357.56,1130 2395,1130 2432.44,1130 1855.12,1145 1892.56,1145 1930,1145 2357.56,1165 2395,1165 2432.44,1165 1855.12,1180 1892.56,1180 1930,1180 2357.56,1200 2395,1200 2432.44,1200 3767.56,1615 3805,1615 3842.44,1615 3767.56,1650 3805,1650 3842.44,1650 3767.56,1685 3805,1685 3842.44,1685 1827.56,1765 1865,1765 1902.44,1765 3767.56,1795 3805,1795 3842.44,1795 1827.56,1800 1865,1800 1902.44,1800 3767.56,1830 3805,1830 3842.44,1830 1827.56,1835 1865,1835 1902.44,1835 3767.56,1865 3805,1865 3842.44,1865 1687.56,2215 1725,2215 1762.44,2215 1687.56,2250 1725,2250 1762.44,2250 1687.56,2285 1725,2285 1762.44,2285 2527.56,3075 2565,3075 2602.44,3075 3027.56,3085 3065,3085 3102.44,3085 2527.56,3110 2565,3110 2602.44,3110 3027.56,3120 3065,3120 3102.44,3120 2527.56,3145 2565,3145 2602.44,3145 1982.56,3150 2020,3150 2057.44,3150 3027.56,3155 3065,3155 3102.44,3155 1982.56,3185 2020,3185 2057.44,3185 1982.56,3220 2020,3220 2057.44,3220 3472.56,3465 3510,3465 3547.44,3465 3472.56,3500 3510,3500 3547.44,3500 3472.56,3535 3510,3535 3547.44,3535
PWM1: C11.1 U7.12 | length 1399.1
  Top Layer w6: U7.12 3426,1280 C11.1
PWM2: C12.1 U7.14 | length 1102.3
  Top Layer w6: U7.14 2196.06,1380 2284.06,1292 3109.67,1292 C12.1
PWM3: C20.1 U7.16 | length 850.5
  Top Layer w6: U7.16 2190,1480 2223,1447 2223,1370.03 2289.03,1304 2793.33,1304 C20.1
PWM4: C21.1 U7.18 | length 602.3
  Top Layer w6: U7.18 2190,1580 2235,1535 2235,1375 2294,1316 2477,1316 C21.1
PWM_1: U7.8 U8.10 | length 920.8
  Top Layer w6: U8.10 1248.9,1694.13 1295.03,1648 1671.09,1648 1711,1608.09 1711,1379 1760,1330 U7.8
PWM_2: U7.6 U8.11 | length 812.7
  Top Layer w6: U8.11 1268.58,1691.42 1300,1660 1676.06,1660 1723,1613.06 1723,1467 1760,1430 U7.6
PWM_3: U7.4 U8.12 | length 704.5
  Top Layer w6: U8.12 1288.27,1688.7 1304.97,1672 1681.03,1672 1735,1618.03 1735,1555 1760,1530 U7.4
PWM_4: U7.2 U8.13 | length 560
  Top Layer w6: U8.13 1568.27,1801.73 1740,1630 U7.2
RS485A: D6.2 P9.1 R11.1 U6.6 | length 844.7
  Top Layer w6: U6.6 1575,2710 1582,2717 R11.1 1582,3244.29 D6.2 1643.33,3411.67 P9.1
RS485B: D7.2 P9.2 R11.2 U6.7 | length 844.7
  Top Layer w6: P9.2 1461.67,3406.67 D7.2 1518,3249.29 R11.2 1518,2717 1525,2710 U6.7
SWCLK: P10.4 R17.2 U8.37 | length 738.4
  Top Layer w6: P10.4 R17.2 571,1853 663,1853 828.27,2018.27 U8.37
SWDIO: P10.3 R16.2 U8.34 | length 972.2
  Top Layer w6: P10.3 386,2035 R16.2 694,2241 1092.03,2241 1111.1,2221.93 U8.34
TIM3_CH1: P12.3 R20.1 U8.16 | length 2329
  Top Layer w6: U8.16 1390.79,1860.79 v1(1400,1870) ; v1(2500,560) R20.1 P12.3
  Bottom Layer w6: v1(1400,1870) 1619,1651 1619,1282.97 1926.97,975 2440,975 2500,915 v1(2500,560)
TIM3_CH2: P12.4 R24.1 U8.17 | length 2404.7
  Top Layer w6: U8.17 1380.47,1880.47 v1(1400,1900) ; v1(2600,560) R24.1 P12.4
  Bottom Layer w6: v1(1400,1900) 1631,1669 1631,1287.94 1931.94,987 2444.97,987 2600,831.97 v1(2600,560)
TIM4_CH1: P13.3 R21.1 U8.42 | length 2124.5
  Top Layer w6: U8.42 1069.84,1919.84 v1(1080,1930) ; v1(1925,560) R21.1 P13.3
  Bottom Layer w6: v1(1080,1930) 1160,1930 1345,1745 1508.03,1745 1607,1646.03 1607,1278 1925,960 v1(1925,560)
TIM4_CH2: P13.4 R25.1 U8.43 | length 2057.3
  Top Layer w6: U8.43 v1(1080,1900.16) ; v1(1825,560) R25.1 P13.4
  Bottom Layer w6: v1(1080,1900.16) 1159.37,1900.16 1326.53,1733 1503.06,1733 1595,1641.06 1595,1273.03 1825.81,1042.22 1825.81,560.81 v1(1825,560)
USART1_RX: P11.4 U8.31 | length 1245.6
  Top Layer w6: P11.4 498,2742 715,2525 715,2325 785,2255 1095,2255 1170.16,2179.84 U8.31
USART1_TX: P11.3 U8.30 | length 1336.1
  Top Layer w6: P11.3 468,2842 515,2795 515,2741.97 727,2529.97 727,2329.97 789.97,2267 1099.97,2267 1189.84,2177.13 U8.30
USART3_RX: U6.1 U8.22 | length 763.4
  Top Layer w6: U8.22 1529.5,1978.9 1613,2062.4 1613,2227 1475,2365 U6.1
USART3_TX: U6.4 U8.21 | length 729.3
  Top Layer w6: U8.21 1526.79,1959.21 1625,2057.43 U6.4
VCC3.3: C7.2 C8.2 C22.1 C29.2 C30.2 C31.2 C32.2 C33.2 C35.2 L1.1 P10.1 P11.2 P14.2 R10.2 R14.1 R16.1 R17.1 R20.2 R21.2 R24.2 R25.2 U1.2 U1.4 U6.8 U8.1 U8.24 U8.36 U8.48 U9.8 U10.8 | length 13304.6
  Top Layer w8: U8.24 C35.2
  Top Layer w10: 295,2240 299,2236 ; 330,1600.47 339.53,1610 ; R14.1 R14.1@873.27,1801.73 ; C30.2 U8.48 ; U8.36 C31.2
  Top Layer w20: 295,1785 620,1785 650,1815 735,1815 765,1845 830,1845 R14.1 ; 295,1990 507,1990 R16.1 ; 299,2236 P10.1 ; 339.53,1610 1026.73,1610 C29.2 U8.1 ; R17.1 R16.1 ; R14.1@873.27,1801.73 C30.2 ; C31.2 1017.6,2219.13 736.13,2219.13 R16.1 ; R10.2 1285,1120 1525,1360 L1.1 ; 1345,2650 1345,2113.27 C35.2 ; U1.4 1445.72,624 R25.2 R21.2 R20.2 R24.2 ; U6.8 1475,2595 1510,2560 1667.67,2560 2036.67,2929 2398,2929 C33.2 ; U10.8 C33.2 ; U9.8 C32.2 3248.67,2970 2443,2970 C33.2
  Top Layer w40: P11.2 297,2942 295,2940 ; U1.4 1285,784.72 R10.2 985.47,945 330,1600.47 295,1635.47 295,1785 295,1990 295,2240 295,2940 ; U6.8 1474.49,2650 C22.1 1345,2650 1310,2650 1210,2750 P14.2 1095,3565 410,3565 295,3450 295,2940
VCC5: C5.2 C6.2 C15.1 C23.1 P3.3 R9.2 U1.3 U7.20 | length 2025.4
  Top Layer w20: R9.2 1289.16,563.34 1290,562.5 v1(1642.5,562.5) v1(1665,585) ; v1(1785,705) v1(1805,725) 2010,930 2010,1645 2045,1680 U7.20 C23.1
  Bottom Layer w20: v1(1642.5,562.5) v1(1805,725)
VCC12: C1.2 C3.2 C14.1 C16.2 C18.2 D1.1 D2.1 D3.1 D4.1 P2.3 P12.2 P13.2 R8.2 U2.1 U2.3 U3.1 U3.3 U4.1 U4.3 U5.1 U5.3 | length 4172.2
  Top Layer w20: D4.1 2420,1550 2435,1535 C18.2 2450,1505 2515,1505 ; U5.1 2515,1505 ; U5.3 2615,1503.33 2636.67,1525 ; C16.2 2776.67,1503.33 2843.33,1503.33 ; D3.1 2763.33,1526.67 2765,1525 ; U4.1 2843.33,1503.33 ; U4.3 2943.33,1501.67 2966.67,1525 ; C3.2 3103.33,1501.67 3171.67,1501.67 ; D2.1 3091.67,1526.67 3090,1525 ; U3.1 3171.67,1501.67 ; U3.3 3271.67,1505 3291.67,1525 ; C1.2 3435,1505 3500,1505 ; D1.1 3420,1525 ; U2.1 3500,1505 ; U2.3 3600,1500 3625,1525 ; 3722,1525 3625,1525 ; 2515,1505 2535,1525 2636.67,1525 ; 2636.67,1525 2765,1525 ; 2765,1525 2865,1525 ; 2843.33,1503.33 2865,1525 ; 2865,1525 2966.67,1525 ; 2966.67,1525 3090,1525 ; 3090,1525 3195,1525 ; 3171.67,1501.67 3195,1525 ; 3195,1525 3291.67,1525 ; 3291.67,1525 3420,1525 ; 3420,1525 3520,1525 ; 3500,1505 3520,1525 ; 3520,1525 3625,1525
  Top Layer w30: R8.2 3114.5,1210 ; 3075,1210 3114.5,1210 ; 3722,1525 3815,1432 3815,1290 3735,1210 3114.5,1210
VCC36: C13.1 C24.2 C25.2 P1.3 Q1.2 Q2.2 Q3.2 Q4.2 R7.2 | length 4453.8
  Top Layer w30: Q3.2 2576.67,2471 C25.2 ; Q1.2 3596.67,2547.33 C24.2
  Top Layer w40: R7.2 v4(2700,3260)
  Bottom Layer w40: v4(2700,3260) 2755,3260 2911.18,3416.18 P1.3
  Bottom Layer w125: Q4.2 2108.33,2371.67 2181.5,2298.5 ; 2521.83,2298.5 2576.67,2353.33 Q3.2 ; Q2.2 3045,2375 3121.5,2298.5 ; 3423.5,2298.5 3513.33,2388.33 Q1.2
  Bottom Layer w250: 2080,2298.5 2181.5,2298.5 2521.83,2298.5 3121.5,2298.5 3423.5,2298.5 3696.08,2298.5 3780,2382.41 3780,3435
  other v1: 3767.56,2395 3805,2395 3842.44,2395 3767.56,2430 3805,2430 3842.44,2430 3767.56,2465 3805,2465 3842.44,2465 3762.56,2715 3800,2715 3837.44,2715 3762.56,2750 3800,2750 3837.44,2750 3762.56,2785 3800,2785 3837.44,2785 3765,3015 3802.44,3015 3839.88,3015 3765,3050 3802.44,3050 3839.88,3050 3765,3085 3802.44,3085 3839.88,3085
VDDA: C9.2 C10.2 L1.2 U8.9 | length 430.9
  Top Layer w10: U8.9 1229.21,1690.79 1290,1630 1373.64,1630 1395.55,1608.09 C10.2 C9.2 L1.2
pads on no net: H1.1 H2.1 H3.1 H4.1 U8.2 U8.3 U8.4 U8.32 U8.33 U8.39 U8.40 U8.41 U8.45 U8.46 U9.6 U10.6

## Polygon pours and split planes (outlines as drawn)
DGND on Top Layer "Top Layer-VCC3.3 1" (solid, pour order 88): 0,0 2265,0 3932.9,0 3937.01,1155 3260,1160 3159.88,1055 1815,1055 1635,1235 1635,2579.88 1910,2854.88 1910,3936.86 0.53,3937.02
PGND on Top Layer "Top Layer-PGND" (solid, pour order 124): 1935,3935 1935,2840.26 1665,2570.26 1665,1257.81 1852.81,1070 3145,1070 3265,1190 3937.01,1190 3937.01,2135.5 2019.91,2141.5 1935,2227 1935,2457.6 2019.91,2542.51 3530,2542.51 3642.28,2657.72 3645,3525 3570,3600 3320,3600 3175,3455 3174.93,3324.93 3075,3225 2626.88,3225 2554.78,3297.1 2554.78,3937.01
AGND on Top Layer "Top Layer-AGND" (solid, pour order 126): 2003.75,3065.77 2126.84,3065.77 2164.75,3027.85 3312.34,3027.85 3467.33,2872.86 3467.33,2770.26 3417.6,2720.54 2159.58,2720.54 2102.84,2777.28 2102.84,2959.77 2052.84,3009.77 2002.84,3009.77 1984.75,3027.85 1984.75,3049.77
VCC36 on Top Layer "Top Layer-VCC36" (solid, pour order 128): 2560,3940 2560,3310 2635,3235 3065,3235 3160,3330 3160,3465 3310,3615 3570,3615 3660,3525 3660,2653.17 3534.7,2527.87 3534.41,2170 3937.01,2170 3937.01,3937.99 3935,3940
IN1- on Top Layer "Top Layer-IN1- 1" (solid, pour order 102): 3356.97,2713.21 3398.76,2755 3585,2755 3585,2038.49 3480.96,2038.49 3280,2239.45 3280,2500 3356.97,2576.97
IN2- on Top Layer "Top Layer-IN2- 1" (solid, pour order 100): 2488.64,2698.27 2640,2698.27 2676.68,2668.91 2677.02,2047.91 2655.38,2026.27 2621.55,2026.27 2548.73,2026.27 2517.83,2057.17 2331,2244 2331,2466.06 2463.09,2598.15 2462.87,2672.5
IN1+ on Top Layer "Top Layer-IN1+ 1" (solid, pour order 98): 3100,2801.13 3147.96,2849.09 3227,2849.09 3248.67,2827.42 3248.67,2773.5 3272.17,2750 3335,2750 3360,2725 3360,2590.83 3272.17,2503 3158.55,2503 3100,2587.53
MOTOR2 on Top Layer "Top Layer-MOTOR2 1" (solid, pour order 96): 2995,2850 2732.09,2587.09 2732.09,2279.85 3000.05,2011.89 3106.77,2011.89 3207.67,2088.33 3207.67,2265 3134.81,2339.14 3134.35,2780.15 3064.5,2850
IN2+ on Top Layer "Top Layer-IN2+ 1" (solid, pour order 94): 2230,2849.09 2250.16,2869.25 2315,2869.25 2360,2824.25 2360,2770 2380,2750 2450,2750 2470,2730 2470,2601.99 2315,2446.99 2315,2170.36 2500.36,1985 2793.9,1985 2800,1978.9 2800,1970 2789.29,1959.29 2485.71,1959.29 2267.26,2177.74 2267.26,2481.32 2230,2518.59
VCC5 on Top Layer "Top Layer-VCC5" (solid, pour order 16): 410,575 600,575 660,635 1235,635 1288.27,581.73 1288.27,453.27 1250,415 1147.05,415 1032.05,530 785,530 735,530 630,425 410,425 380,455 380,550
VCC12 on Top Layer "Top Layer-VCC12 5" (solid, pour order 122): 2536.98,1535 3725,1535 3730,1530 3730,1516.67 3715,1501.67 2518.33,1501.67 2514.37,1505.63 2514.37,1521.01
no net on Top Layer "Top Layer-No Net 7" (solid, pour order 118): 3690,1580
no net on Top Layer "Top Layer-No Net 3" (solid, pour order 92): 2390,1955
MOTOR4 on Top Layer "Top Layer-MOTOR4 1" (solid, pour order 90): 2172.82,2883 2055.63,2883 1845,2672.37 1845,2119.33 1966.38,1997.95 2131.16,1997.95 2172.82,2039.61
no net on Top Layer "Top Layer-No Net 4" (solid, pour order 86): 5,590
no net on Top Layer "Top Layer-No Net 5" (solid, pour order 72): 2350,1850
no net on Top Layer "Top Layer-No Net 6" (solid, pour order 70): 2335,1855
IN1- on Top Layer "Top Layer-IN1-" (solid, pour order 62): 3370,2707 3388,2725 3471.17,2725 3503.75,2692.42 3503.75,2501.23 3480,2477.48 3480,2440 3455,2415 3360,2415 3330,2445 3330,2550 3370,2590
MOTOR2 on Top Layer "Top Layer-MOTOR2" (solid, pour order 60): 3010,2440 2980,2410 2900,2410 2875,2435 2875,2707 2963,2795 3071.67,2795 3091.67,2775 3091.67,2551.67 3050,2510 3030,2510 3010,2490
IN2- on Top Layer "Top Layer-IN2-" (solid, pour order 56): 2415,2450 2450,2415 2510,2415 2540,2445 2540,2485 2610,2555 2610,2678.27 2592.25,2696.01 2496.01,2696.01 2476.67,2676.67 2476.67,2586.67 2415,2525
MOTOR4 on Top Layer "Top Layer-MOTOR4" (solid, pour order 54): 1945,2430 1980,2395 2040,2395 2070,2425 2070,2530 2095,2555 2200,2555 2220,2575 2220,2775 2200,2795 2145,2795 2120,2770 2120,2698.27 2081.73,2660 1990,2660 1945,2615
IN1+ on Top Layer "Top Layer-IN1+" (solid, pour order 52): 3120,2790 3210,2790 3250,2750 3335,2750 3360,2725 3360,2590.83 3324.17,2555 3120,2555 3100,2575 3100,2770
IN2+ on Top Layer "Top Layer-IN2+" (solid, pour order 50): 2250,2790 2340,2790 2380,2750 2450,2750 2470,2730 2470,2602.51 2422.49,2555 2250,2555 2230,2575 2230,2770
VCC3.3 on Top Layer "Top Layer-VCC3.3" (solid, pour order 44): 950,700 1289,700 1354,765 1455,765 1490,730 1490,605 1465,580 1335,580 1270,645 940,645 925,660 925,690
NetP1_1 on Top Layer "Top Layer-NetP1_1" (solid, pour order 40): 2075,3556.67 2075,3401.73 2194.04,3282.69 2602.69,3282.69 2750,3430 2750,3867.69 2700.31,3917.38 2322.38,3917.38 2265,3860 2265,3629.44 2255.78,3620.22 2138.27,3619.94
VCC12 on Top Layer "Top Layer-VCC12" (solid, pour order 36): 2778.33,3690
VCC12 on Top Layer "Top Layer-VCC12 3" (solid, pour order 34): 3064.5,805
VCC12 on Top Layer "Top Layer-VCC12 4" (solid, pour order 32): 3057.33,483.57 3057.33,267.33 3020,230 2715,230 2700,245 2070,245 2025,290 2025,470 2045,490 2090,490 2115,465 2115,360 2140,335 2365,335 2390,360 2390,483.33 2411.67,505 2475,505 2490,490 2490,360 2520,330 2685,330 2835,480 2835,1160 2895,1220 3075,1220 3103.33,1191.67 3103.33,532.86
VCC12 on Top Layer "Top Layer-VCC12 1" (solid, pour order 30): 3155,675
VCC12 on Top Layer "Top Layer-VCC12 2" (solid, pour order 24): 3050,465
NetP2_1 on Top Layer "Top Layer-NetP2_1" (solid, pour order 8): 3075,275 3075,470 3100,495 3585,495 3625,455 3625,285 3565,225 3091.67,225
no net on Top Layer "Top Layer-No Net" (solid, pour order 6): 3070,330
NetP3_1 on Top Layer "Top Layer-NetP3_1" (solid, pour order 4): 375,1085 570,1085 640,1015 640,660 570,590 375,590 295,670 295,1050
no net on Top Layer "Top Layer-No Net 1" (solid, pour order 2): 390,1080
no net on Top Layer "Top Layer-No Net 2" (solid, pour order 0): 390,1080
DGND on Bottom Layer "Bottom Layer-DGND 1" (solid, pour order 116): 1915,3936.43 1915,2855 1635,2575 1635,1283.94 1868.94,1050 3150,1050 3265,1165 3935,1165 3935,0 0,0 0,3936.96
PGND on Bottom Layer "Bottom Layer-PGND 1" (solid, pour order 114): 1932.72,3940 2560,3940 2560,3308.09 2638.09,3230 3110,3230 3175,3295 3175,3458.33 3321.67,3605 3570,3605 3645,3530 3645,2660 3520,2535 2002.29,2535 1937.61,2470.32 1937.61,2202.39 1985,2155 3935,2155 3935,1185 3255,1185 3140,1070 1865,1070 1640,1295 1640,2555 1935.78,2850.78
AGND on Bottom Layer "Bottom Layer-AGND" (solid, pour order 112): 2125,3075 2145,3075 2245,2975 3355,2975 3405,2925 3475,2855 3475,2790 3433.82,2745 2165,2745 2105,2805 2105,3055
VCC36 on Bottom Layer "Bottom Layer-VCC36 1" (solid, pour order 106): 2560,3940 2560,3350 2655,3255 3090,3255 3165,3330 3165,3458.33 3316.67,3610 3570,3610 3655,3525 3655,2645 3530,2520 2010,2520 1950,2460 1950,2210 1990,2170 3935,2170 3935.89,3936.65
IN2- on Bottom Layer "Bottom Layer-IN2-" (solid, pour order 108): 3935,3795
DGND on Bottom Layer "Bottom Layer-DGND" (solid, pour order 68): 740,530 695,485 695,195 785,105 1062.5,105 1135,177.5 1135,730 1290,885 1575,885 1665,975 1665,1150 1480,1335 1480,1485 1410,1555 405,1555 275,1425 275,1130 320,1085 640,1085 900,825 900,595 835,530
PGND on Bottom Layer "Bottom Layer-PGND" (solid, pour order 66): 2075,3495
MOTOR2 on Bottom Layer "Bottom Layer-MOTOR2" (solid, pour order 64): 2065,3495
VCC36 on Bottom Layer "Bottom Layer-VCC36" (solid, pour order 48): 2823.09,3745 2823.09,3415.63 2913.71,3325 3068.09,3325 3158.09,3415 3158.09,3516.67 3251.42,3610 3478.09,3610 3528.09,3660 3528.09,3855 3463.09,3920 2909.27,3920

## Keep-outs
Keep-Out Layer:
  the board outline again, w7

## Other copper
Top Layer:
  pour cut-out: 3647.23,2780.49 3654.7,2773.02 3654.7,2675.1 3611.6,2632 3560.17,2632 3552.84,2639.33 3552.84,2657.9 3541.83,2668.91 3541.83,2678.99 3569.01,2706.17 3569.01,2780.49
  pour cut-out: 2997.68,2869.5
  pour cut-out: 3014,2782.5 2926.5,2782.5 2908.87,2800.13 2978.23,2869.5 3014,2869.5
  pour cut-out: 2725,2562.97 2725,2511.46 2730.79,2505.67 2759.07,2505.67 2796.95,2543.55 2791.02,2549.48 2755,2549.48 2755,2561.52 2738.4,2578.13
  pour cut-out: 3088.5,2520.5 3088.5,2555.75 3095,2562.24 3101.61,2562.24 3140,2523.85 3140,2517.94 3132.06,2510 3100.77,2510
  pour cut-out: 3091.84,2028.5 3087.46,2024.13 3087.46,2012.42 3089.48,2010.4 3091.84,2010.4
  pour cut-out: 3091.84,2028.5 3091.84,2010.4 3109.7,1992.54 3130.04,2012.88 3130.04,2030 3121.55,2038.49 3100.16,2038.49
  pour cut-out: 3305.96,2150 3349.09,2150 3383.88,2115.21 3416.67,2115.21 3431.88,2100 3431.88,2082.99 3397.68,2048.79 3374.81,2048.79 3305.96,2117.64
  pour cut-out: 2825,2155 2882.41,2097.59 2929.23,2097.59 2976.83,2050 2976.83,2005 3038.5,2005 3088.5,1955 3088.5,1946.2 3078.3,1936 3052.23,1936 3031.23,1915 3019.1,1915 2799.1,2135 2806.2,2142.11 2806.2,2155
  pour cut-out: 2394,2150 2411.61,2150 2524.64,2036.98 2524.64,2004.11 2495.16,2004.11 2381.62,2117.64 2381.62,2141.98
Bottom Layer:
  pour cut-out: 2105,2136 2082.12,2158.88 2045,2158.88 2030,2143.88 2030,2134.49 2068.92,2095.57
  pour cut-out: 2530.65,2113.49 2548.04,2113.49 2583.55,2149.01 2572.56,2160 2505,2160 2500,2155 2500,2130
  pour cut-out: 2968.33,2160 3030.77,2160 3040.77,2150 3040.77,2140.77 3015,2115 2991.35,2115 2968.33,2138.02
  pour cut-out: 3434.22,2150 3505,2150 3525,2130 3515,2120 3488.18,2120 3478.18,2110 3453.82,2110 3433.82,2130
  pour cut-out: 3462.68,2492.49 3488.18,2517.98 3488.18,2535 3434.22,2535 3420.81,2521.6 3420.81,2513.35
  pour cut-out: 3556.84,2542.15 3556.84,2517.47 3556.84,2503.16 3530,2530 3530,2542.56 3547.44,2560

## Silkscreen, mask and mechanical layers (free items; w line width, h text height)
Top Overlay:
  text "B15" at 690,3520 h40
  text "B14" at 813,3520 h40
  text "B13" at 936,3520 h40
  text "B12" at 1059,3520 h40
  text "3V3" at 1182,3520 h40
  text "GND" at 1305,3520 h40
  text "485B" at 1435,3520 h40
  text "485A" at 1605,3520 h40
  text "-" at 2015,3520 h40
  text "+" at 2115,3520 h40
  text "GND" at 305,3080 h40 r90
  text "3V3" at 305,2936.67 h40 r90
  text "TXD" at 305,2793.33 h40 r90
  text "RXD" at 305,2650 h40 r90
  text "3V3" at 300,2270 h40 r90
  text "GND" at 300,2141 h40 r90
  text "IO" at 300,2030 h40 r90
  text "CLK" at 300,1883 h40 r90
  text "A15" at 300,1754 h40 r90
  text "RST" at 300,1625 h40 r90
  text "SWD" at 335,1616 h40
  text "-" at 310,1115 h40
  text "+" at 310,1015 h40
  text "-" at 3600,515 h40
  text "TIM4" at 1815,475 h40
  text "TIM3" at 2595,475 h40
  text "+" at 3600,415 h40
  text "CH2" at 1745,290 h40
  text "CH1" at 1875,290 h40
  text "12V" at 2005,290 h40
  text "GND" at 2135,290 h40
  text "GND" at 2290,290 h40
  text "12V" at 2425,290 h40
  text "CH1" at 2560,290 h40
  text "CH2" at 2695,290 h40
Mechanical 1:
  lines w7: 2170,3071.25 2320,3071.25 ; 2170,3071.25 2170,3071.25 ; 2170,3071.25 2170,3235 2320,3235 ; 2320,3071.25 2320,3235 ; 2320,3071.25 2320,3071.25 ; 2320,3235 2320,3235 ; 3543.75,2955 3543.75,3117.5 ; 3543.75,2955 3543.75,2955 ; 3543.75,2955 3430,2955 3430,3117.5 3543.75,3117.5 ; 3543.75,3117.5 3543.75,3117.5 ; 3543.75,3137.5 3543.75,3305 ; 3543.75,3137.5 3543.75,3137.5 ; 3543.75,3137.5 3430,3137.5 3430,3305 3543.75,3305 ; 3543.75,3305 3543.75,3305 ; 0,150 ccw(c150,150) 150,0 3787.01,0 ccw(c3787.01,150) 3937.01,150 3937.01,3787.01 ccw(c3787.01,3787.01) 3787.01,3937.01 150,3937.01 ccw(c150,3787.01) 0,3787.01 0,150 ; 105,978.75 255,978.75 255,1191.25 105,1191.25 105,978.75 ; 105,1686.25 245,1686.25 245,2293.75 105,2293.75 105,1686.25 ; 110,2699.5 245,2699.5 245,3094.5 110,3094.5 110,2699.5 ; 157.5,2595 242.5,2595 242.5,2655 157.5,2655 157.5,2595 ; 157.5,3140 242.5,3140 242.5,3200 157.5,3200 157.5,3140 ; 160,1585 245,1585 245,1645 160,1645 160,1585 ; 160,2330 245,2330 245,2390 160,2390 160,2330 ; 170,890 255,890 255,950 170,950 170,890 ; 170,1225 255,1225 255,1285 170,1285 170,1225 ; 655,3632.5 715,3632.5 715,3717.5 655,3717.5 655,3632.5 ; 757.5,3635 1365,3635 1365,3770 757.5,3770 757.5,3635 ; 1447.5,3635 1660,3635 1660,3770 1447.5,3770 1447.5,3635 ; 1705,3635 1765,3635 1765,3720 1705,3720 1705,3635 ; 1720,135 1780,135 1780,220 1720,220 1720,135 ; 1817.5,95 2212.5,95 2212.5,220 1817.5,220 1817.5,95 ; 1845,3635 1905,3635 1905,3720 1845,3720 1845,3635 ; 1945,3635 2157.5,3635 2157.5,3770 1945,3770 1945,3635 ; 2190,3635 2250,3635 2250,3720 2190,3720 2190,3635 ; 2292.5,95 2687.5,95 2687.5,220 2292.5,220 2292.5,95 ; 2725,135 2785,135 2785,220 2725,220 2725,135 ; 3463.75,2897 3543.75,2897 3543.75,2937 3463.75,2937 3463.75,2897 ; 3463.75,3320 3543.75,3320 3543.75,3360 3463.75,3360 3463.75,3320 ; 3660,360 3745,360 3745,420 3660,420 3660,360 ; 3660,457.5 3800,457.5 3800,670 3660,670 3660,457.5 ; 3660,705 3745,705 3745,765 3660,765 3660,705